# Altium PCB PCB1.PcbDoc
Units mil, origin at the board's own origin, x right, y up, seen from the top; angles counter-clockwise.
Board outline 2041.37 x 398.97 mil, 2 copper layers (Top Layer, Bottom Layer); 9 components, 9 nets, 26 pads, 14 vias.
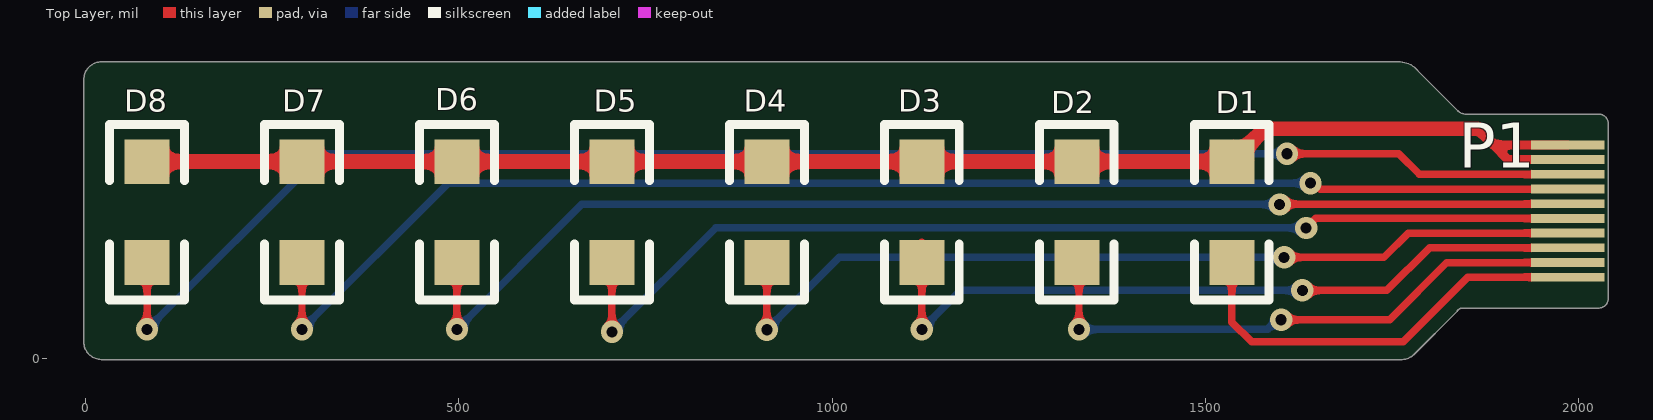
[diagram p0: Top Layer view]
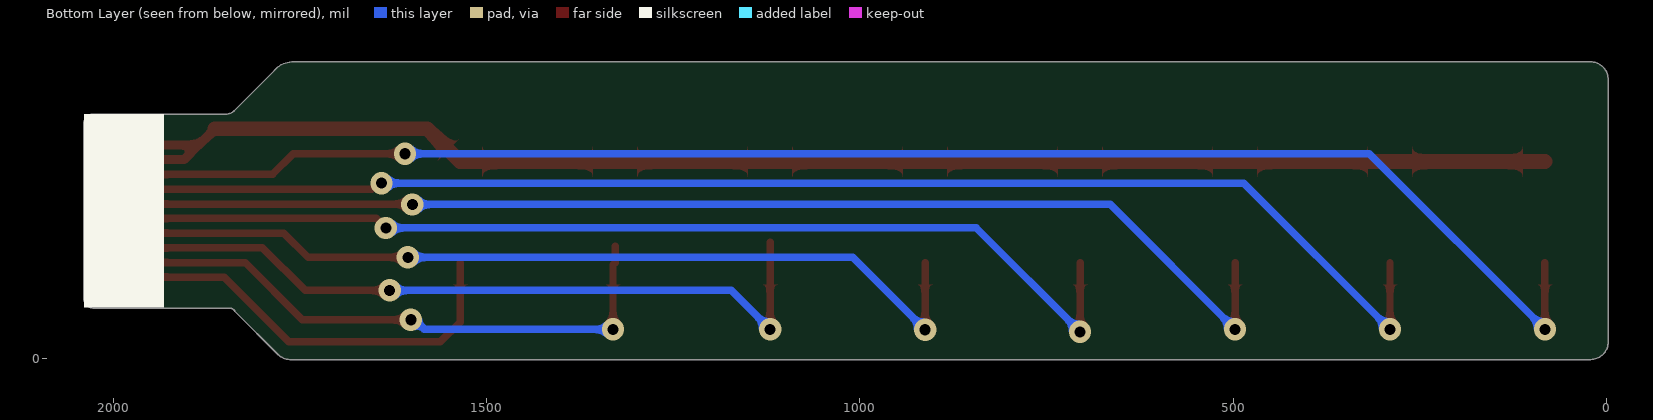
[diagram p1: Bottom Layer view, seen from below]
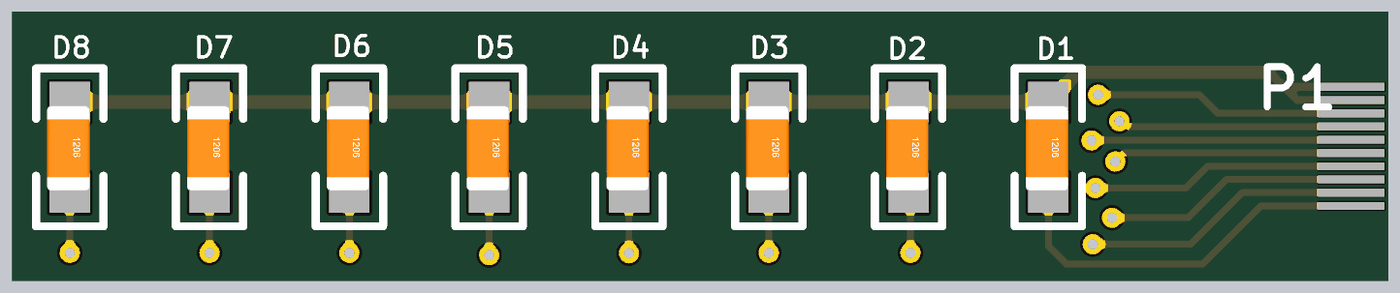
[diagram p2: 3D render of the assembled board from above, using the file's embedded part models]

## Layer stack, top to bottom
Top Solder: solder mask 0.4, Solder Resist, Dk 3.5
Top Layer: signal copper 1.4
Dielectric 1: dielectric 12.6, FR-4, Dk 4.8
Bottom Layer: signal copper 1.4
Bottom Solder: solder mask 0.4, Solder Resist, Dk 3.5

## Board outline
21.62,-1.98 ccw(c21.65,21.65) 21.65,-1.98 1760.78,-1.98 ccw(c1761.75,-0.25) 1761.75,-2.23 ccw(c1761.71,23.23) 1778.9,4.44 ccw(c1777.56,5.91) 1778.97,4.51 1778.96,4.5 1836.92,62.47 ccw(c1835.52,63.87) 1837.48,63.53 cw(c1844.49,58.07) 1845.29,66.92 ccw(c1845.47,68.9) 1845.47,66.91 2026.57,66.91 ccw(c2026.57,79.72) 2039.39,79.72 2039.39,313.98 ccw(c2026.57,313.98) 2026.57,326.79 ccw(c2026.57,324.8) 2026.55,326.79 1848.33,326.79 cw(c1848.33,341.54) 1837.8,331.21 ccw(c1836.04,330.3) 1837.44,331.7 1785.95,383.2 ccw(c1758.56,362.28) 1758.27,396.74 ccw(c1758.28,394.76) 1757.75,396.67 21.65,396.67 cw(c21.65,394.68) 21.68,396.67 21.65,396.67 ccw(c21.65,373.03) -1.98,373.03 -1.98,21.65 ccw(c21.65,21.65)

## Design rules (kind name [scope] priority, off if disabled: settings)
Clearance [All] p1: gap=5 ignorepadtopadclearanceinfootprint=FALSE
HoleSize [All] p1: absolutevalues=TRUE maxlimit=248.03 minlimit=7.87 maxpercent=80.000 minpercent=20.000
MinimumSolderMaskSliver [All] p1: minsoldermaskwidth=3
PolygonConnect [All] p1: connectstyle=Relief reliefconductorwidth=10 reliefentries=4 polygonreliefangle="90 Angle" airgapwidth=10
RoutingVias [All] p1: holewidth=15 width=30 viastyle="Through Hole" minholewidth=10 minwidth=20 maxholewidth=25 maxwidth=50
SolderMaskExpansion [All] p1: expansion=4
Width [All] p1: maxlimit=20 minlimit=3 preferedwidth=10
28 further rules are at their usual default settings.

## Components (designator, comment, footprint, x,y, rotation, side; value= is the part's Value field where it differs from the comment)
D1 "Photo Sen" 1206C 1535.43,262.95 r270 top
D2 "Photo Sen" 1206C 1327.9,262.95 r270 top
D3 "Photo Sen" 1206C 1120.36,262.95 r270 top
D4 "Photo Sen" 1206C 912.82,262.95 r270 top
D5 "Photo Sen" 1206C 705.29,262.95 r270 top
D6 "Photo Sen" 1206C 497.75,262.95 r270 top
D7 "Photo Sen" 1206C 290.21,262.95 r270 top
D8 "Photo Sen" 1206C 82.68,262.95 r270 top
P1 "Header 10" FPC-10P 1935.04,101.38 r0 top

## Footprints (in the part's own frame and the unit in brackets; to place one, negate y for a bottom-side part, rotate by r counter-clockwise, add the part's x,y. Pads: shape width x height; smd on the part's side, far side on the other; paste and mask are expansions set on the pad)
1206C [mil]
  rect 60x60 smd: 1(0,0) 2(135,0)
  silkscreen extent -50,-50 185,50, body extent 6,-33 132,30, height 40
FPC-10P [mm]
  rect 2.5x0.3 smd mask+0.05: 1(1.275,0.175) 2(1.275,0.675) 3(1.275,1.175) 4(1.275,1.675) 5(1.275,2.175) 6(1.275,2.675) 7(1.275,3.175) 8(1.275,3.675) 9(1.275,4.175) 10(1.275,4.675)

## Part data
D1 D2 D3 D4 D5 D6 D7 D8: "Photosensitive Diode", LatestRevisionDate=17-Jul-2002, LatestRevisionNote="Re-released for DXP Platform.", PackageReference=PIN2, Published=24-Mar-1999, Publisher="Altium Limited"
P1: "Header, 10-Pin", LatestRevisionDate=17-Jul-2002, LatestRevisionNote="Re-released for DXP Platform.", Publisher="Altium Limited"

## Via types
v1: diameter 30, hole 15, Top Layer to Bottom Layer, 14 vias

## Nets (pads, with @x,y where several pads share a name; then routed paths per layer and width w, separated by ;. In a path a pad name is that pad's centre, name@x,y a point inside that pad or via, vN(x,y) a via of type N, cw(c..) or ccw(c..) an arc to the next point about the centre after c; other vN are vias at no path point)
NetD1_2: D1.2 P1.1 | length 576.4
  Top Layer w10: D1.2 1535.43,48.23 1562.01,21.65 1764.76,21.65 1851.38,108.27 P1.1
NetD2_2: D2.2 P1.2 | length 804.2
  Top Layer w10: D2.2@1327.9,149.75 D2.2 1330.71,125.14 v1(1330.71,38.39) ; v1(1601.38,51.18) 1746.61,51.18 1823.38,127.95 P1.2
  Bottom Layer w10: v1(1330.71,38.39) 1583.17,38.39 1595.97,51.18 v1(1601.38,51.18)
NetD3_2: D3.2 P1.3 | length 1028.5
  Top Layer w10: v1@1120.36,36.42 v1(1120.36,38.39) D3.2 D3.2@1120.36,154.81 ; v1(1629.92,90.55) 1743.11,90.55 1800.2,147.64 P1.3
  Bottom Layer w10: v1(1120.36,38.39) 1172.53,90.55 v1(1629.92,90.55)
NetD4_2: D4.2 P1.4 | length 1216.2
  Top Layer w10: v1(912.82,37.82) D4.2 ; v1(1605.32,134.84) 1739.17,134.84 1771.65,167.32 P1.4
  Bottom Layer w10: v1(912.82,37.82) 1009.84,134.84 v1(1605.32,134.84)
NetD5_2: D5.2 P1.5 | length 1435.9
  Top Layer w10: v1(705.29,35.01) D5.2 ; v1(1634.84,174.21) 1647.64,187.01 P1.5
  Bottom Layer w10: v1(705.29,35.01) 844.49,174.21 v1(1634.84,174.21)
NetD6_2: D6.2 P1.6 | length 1653.9
  Top Layer w10: v1@497.75,31.21 v1(497.75,38.39) D6.2 ; v1(1599.41,205.71) 1599.9,206.2 1984.74,206.2 P1.6
  Bottom Layer w10: v1(497.75,38.39) 665.07,205.71 v1(1599.41,205.71)
NetD7_2: D7.2 P1.7 | length 1857.3
  Top Layer w10: v1@290.21,50.06 D7.2 ; v1(1640.75,234.25) 1646.16,234.25 1654.03,226.38 P1.7
  Bottom Layer w10: v1(290.21,38.39) 486.08,234.25 v1(1640.75,234.25)
NetD8_2: D8.2 P1.8 | length 2102.9
  Top Layer w10: v1@82.68,36.42 v1(82.68,38.39) D8.2 ; v1(1609.25,273.62) 1759.1,273.62 1786.66,246.06 P1.8
  Bottom Layer w10: v1(82.68,38.39) 317.91,273.62 v1(1609.25,273.62)
VCC: D1.1 D2.1 D3.1 D4.1 D5.1 D6.1 D7.1 D8.1 P1.9 P1.10 | length 2038.1
  Top Layer w11.81: 1863.43,307.09 1885.08,285.43 ; P1.9 1904.76,265.75 1885.08,285.43 ; P1.10 1885.08,285.43
  Top Layer w20: D8.1 D7.1 D6.1 D5.1 D4.1 D3.1 D2.1 D1.1 1579.57,307.09 1863.43,307.09

## Silkscreen, mask and mechanical layers (free items; w line width, h text height)
Bottom Overlay:
  rectangle: 1932.09,67.91 2039.37,326.77
Drill Drawing:
  lines w1: 1836.04,330.19 1836.04,330.3 ; 1836.04,330.3 1836.04,330.3
  lines w3.94: 1758.28,394.68 21.65,394.68 ccw(c21.65,373.03) 0,373.03 0,21.65 ccw(c21.65,21.65) 21.65,0 1761.75,0 ; 1758.28,394.76 cw(c1758.56,362.28) 1784.45,381.89 1836.04,330.3 ; 1761.75,-0.25 ccw(c1761.71,23.23) 1777.56,5.91 1835.52,63.87 ; 1835.36,63.97 cw(c1844.49,58.07) 1845.47,68.9 2026.57,68.9 ccw(c2026.57,79.72) 2037.4,79.72 2037.4,313.98 ccw(c2026.57,313.98) 2026.57,324.8 1848.33,324.8 cw(c1848.33,341.54) 1836.04,330.19